# Altium PCB 2.0 IC patch.PcbDoc
Units mm, origin at the board's own origin, x right, y up, seen from the top; angles counter-clockwise.
Board outline 8.59 x 10.83 mm, 2 copper layers (Top Layer, Bottom Layer); 1 components, 0 nets, 56 pads, 0 vias.
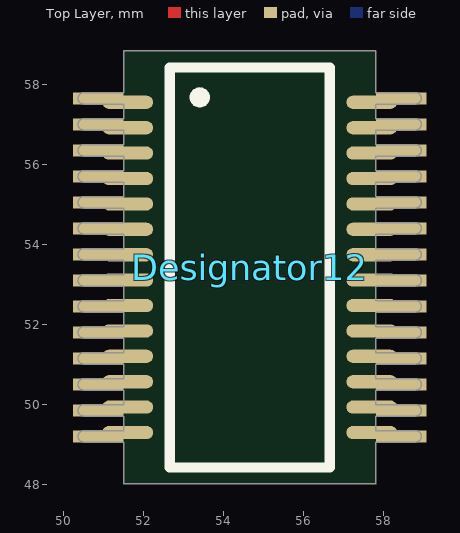
[diagram p0: Top Layer view]
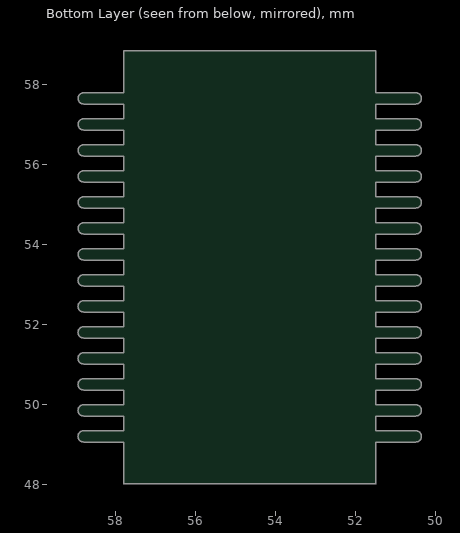
[diagram p1: Bottom Layer view, seen from below]

## Layer stack, top to bottom
Top Solder: solder mask 0.0102, Solder Resist, Dk 3.5
Top Layer: signal copper 0.0356
Dielectric 1: dielectric 0.32, FR-4, Dk 4.8
Bottom Layer: signal copper 0.0356
Bottom Solder: solder mask 0.0102, Solder Resist, Dk 3.5

## Board outline
50.495,49.061 cw(c50.495,49.201) 50.495,49.341 51.496,49.341 51.496,49.711 50.495,49.711 cw(c50.495,49.851) 50.495,49.991 51.496,49.991 51.496,50.361 50.495,50.361 cw(c50.495,50.501) 50.495,50.641 51.496,50.641 51.496,51.011 50.495,51.011 cw(c50.495,51.151) 50.495,51.291 51.496,51.291 51.496,51.661 50.495,51.661 cw(c50.495,51.801) 50.495,51.941 51.496,51.941 51.496,52.311 50.495,52.311 cw(c50.495,52.451) 50.495,52.591 51.496,52.591 51.496,52.961 50.495,52.961 cw(c50.495,53.101) 50.495,53.241 51.496,53.241 51.496,53.611 50.495,53.611 cw(c50.495,53.751) 50.495,53.891 51.496,53.891 51.496,54.261 50.495,54.261 cw(c50.495,54.401) 50.495,54.541 51.496,54.541 51.496,54.911 50.495,54.911 cw(c50.495,55.051) 50.495,55.191 51.496,55.191 51.496,55.561 50.495,55.561 cw(c50.495,55.701) 50.495,55.841 51.496,55.841 51.496,56.211 50.495,56.211 cw(c50.495,56.351) 50.495,56.491 51.496,56.491 51.496,56.861 50.495,56.861 cw(c50.495,57.001) 50.495,57.141 51.496,57.141 51.496,57.511 50.495,57.511 cw(c50.495,57.651) 50.495,57.791 51.496,57.791 51.496,58.828 cw(c51.509,58.828) 51.509,58.841 57.785,58.841 cw(c57.785,58.828) 57.787,58.84 cw(c57.787,58.827) 57.8,58.827 57.8,57.791 58.799,57.791 cw(c58.799,57.651) 58.939,57.651 cw(c58.799,57.651) 58.799,57.511 57.8,57.511 57.8,57.141 58.799,57.141 cw(c58.799,57.001) 58.939,57.001 cw(c58.799,57.001) 58.799,56.861 57.8,56.861 57.8,56.491 58.799,56.491 cw(c58.799,56.351) 58.939,56.351 cw(c58.799,56.351) 58.799,56.211 57.8,56.211 57.8,55.841 58.799,55.841 cw(c58.799,55.701) 58.939,55.701 cw(c58.799,55.701) 58.799,55.561 57.8,55.561 57.8,55.191 58.799,55.191 cw(c58.799,55.051) 58.939,55.051 cw(c58.799,55.051) 58.799,54.911 57.8,54.911 57.8,54.541 58.799,54.541 cw(c58.799,54.401) 58.939,54.401 cw(c58.799,54.401) 58.799,54.261 57.8,54.261 57.8,53.891 58.799,53.891 cw(c58.799,53.751) 58.939,53.751 cw(c58.799,53.751) 58.799,53.611 57.8,53.611 57.8,53.241 58.801,53.241 cw(c58.801,53.101) 58.941,53.101 cw(c58.801,53.101) 58.801,52.961 57.8,52.961 57.8,52.591 58.801,52.591 cw(c58.801,52.451) 58.941,52.451 cw(c58.801,52.451) 58.801,52.311 57.8,52.311 57.8,51.941 58.801,51.941 cw(c58.801,51.801) 58.941,51.801 cw(c58.801,51.801) 58.801,51.661 57.8,51.661 57.8,51.291 58.801,51.291 cw(c58.801,51.151) 58.941,51.151 cw(c58.801,51.151) 58.801,51.011 57.8,51.011 57.8,50.641 58.801,50.641 cw(c58.801,50.501) 58.941,50.501 cw(c58.801,50.501) 58.801,50.361 57.8,50.361 57.8,49.991 58.801,49.991 cw(c58.801,49.851) 58.941,49.851 cw(c58.801,49.851) 58.801,49.711 57.8,49.711 57.8,49.341 58.801,49.341 cw(c58.801,49.201) 58.941,49.201 cw(c58.801,49.201) 58.801,49.061 57.8,49.061 57.8,48.024 cw(c57.787,48.024) 57.787,48.011 51.511,48.011 cw(c51.511,48.024) 51.509,48.011 cw(c51.509,48.024) 51.496,48.024 51.496,49.061

## Design rules (kind name [scope] priority, off if disabled: settings)
Clearance [All] p1: gap=0.254 ignorepadtopadclearanceinfootprint=FALSE except(0: Arc-Hole Track-Hole SMDPad-Hole THPad-Hole Via-Hole Fill-Hole Poly-Hole Region-Hole Text-Hole)
PolygonConnect [All] p1: connectstyle=Relief reliefconductorwidth=0.254 reliefentries=4 polygonreliefangle="90 Angle" airgapwidth=0.254
RoutingVias [All] p1: holewidth=0.711 width=1.27 viastyle="Through Hole" minholewidth=0.711 minwidth=1.27 maxholewidth=0.711 maxwidth=1.27
SolderMaskExpansion [All] p1: expansion=0.102
Width [All] p1: maxlimit=0.254 minlimit=0.254 preferedwidth=0.254
30 further rules are at their usual default settings.

## Components (designator, comment, footprint, x,y, rotation, side; value= is the part's Value field where it differs from the comment)
Designator12 "Comment" SSOP-28 54.649,53.426 r0 top

## Footprints (in the part's own frame and the unit in brackets; to place one, negate y for a bottom-side part, rotate by r counter-clockwise, add the part's x,y. Pads: shape width x height; smd on the part's side, far side on the other; paste and mask are expansions set on the pad)
SSOP-28 [mm]
  oval 1.27x0.33 smd: 1(-3.05,4.127) 2(-3.05,3.492) 3(-3.05,2.857) 4(-3.05,2.222) 5(-3.05,1.587) 6(-3.05,0.953) 7(-3.05,0.318) 8(-3.05,-0.318) 9(-3.05,-0.953) 10(-3.05,-1.587) 11(-3.05,-2.222) 12(-3.05,-2.857) 13(-3.05,-3.492) 14(-3.05,-4.127) 15(3.05,-4.127) 16(3.05,-3.492) 17(3.05,-2.857) 18(3.05,-2.222) 19(3.05,-1.587) 20(3.05,-0.953) 21(3.05,-0.318) 22(3.05,0.318) 23(3.05,0.953) 24(3.05,1.587) 25(3.05,2.222) 26(3.05,2.857) 27(3.05,3.492) 28(3.05,4.127)
  silkscreen extent -2,-5 2,5, body extent -2,-5 2,5, height 1.75

## Free pads (board coordinates)
  rect 1.27x0.305 smd mask+0: 1(50.861,57.651) 2(50.861,57.001) 3(50.861,56.351) 4(50.861,55.701) 5(50.861,55.051) 6(50.861,54.401) 7(50.861,53.751) 8(50.861,53.101) 9(50.861,52.451) 10(50.861,51.801) 11(50.861,51.151) 12(50.861,50.501) 13(50.861,49.851) 14(50.861,49.201) 15(58.435,49.201) 16(58.435,49.851) 17(58.435,50.501) 18(58.435,51.151) 19(58.435,51.801) 20(58.435,52.451) 21(58.435,53.101) 22(58.435,53.751) 23(58.435,54.401) 24(58.435,55.051) 25(58.435,55.701) 26(58.435,56.351) 27(58.435,57.001) 28(58.435,57.651)

## Nets (pads, with @x,y where several pads share a name; then routed paths per layer and width w, separated by ;. In a path a pad name is that pad's centre, name@x,y a point inside that pad or via, vN(x,y) a via of type N, cw(c..) or ccw(c..) an arc to the next point about the centre after c; other vN are vias at no path point)
pads on no net: Designator12.1 Designator12.2 Designator12.3 Designator12.4 Designator12.5 Designator12.6 Designator12.7 Designator12.8 Designator12.9 Designator12.10 Designator12.11 Designator12.12 Designator12.13 Designator12.14 Designator12.15 Designator12.16 Designator12.17 Designator12.18 Designator12.19 Designator12.20 Designator12.21 Designator12.22 Designator12.23 Designator12.24 Designator12.25 Designator12.26 Designator12.27 Designator12.28

## Silkscreen, mask and mechanical layers (free items; w line width, h text height)
Mechanical 1:
  lines w0.025: 51.511,49.074 50.495,49.074 cw(c50.495,49.201) 50.495,49.328 51.511,49.328 ; 51.511,49.724 50.495,49.724 cw(c50.495,49.851) 50.495,49.978 51.511,49.978 ; 51.511,50.374 50.495,50.374 cw(c50.495,50.501) 50.495,50.628 51.511,50.628 ; 51.511,51.024 50.495,51.024 cw(c50.495,51.151) 50.495,51.278 51.511,51.278 ; 51.511,51.674 50.495,51.674 cw(c50.495,51.801) 50.495,51.928 51.511,51.928 ; 51.511,52.324 50.495,52.324 cw(c50.495,52.451) 50.495,52.578 51.511,52.578 ; 51.511,52.974 50.495,52.974 cw(c50.495,53.101) 50.495,53.228 51.511,53.228 ; 51.511,53.624 50.495,53.624 cw(c50.495,53.751) 50.495,53.878 51.511,53.878 ; 51.511,54.274 50.495,54.274 cw(c50.495,54.401) 50.495,54.528 51.511,54.528 ; 51.511,54.924 50.495,54.924 cw(c50.495,55.051) 50.495,55.178 51.511,55.178 ; 51.511,55.574 50.495,55.574 cw(c50.495,55.701) 50.495,55.828 51.511,55.828 ; 51.511,56.224 50.495,56.224 cw(c50.495,56.351) 50.495,56.478 51.511,56.478 ; 51.511,56.874 50.495,56.874 cw(c50.495,57.001) 50.495,57.128 51.511,57.128 ; 51.511,57.524 50.495,57.524 cw(c50.495,57.651) 50.495,57.778 51.511,57.778 ; 57.783,53.624 58.799,53.624 ccw(c58.799,53.751) 58.799,53.878 57.783,53.878 ; 57.783,54.274 58.799,54.274 ccw(c58.799,54.401) 58.799,54.528 57.783,54.528 ; 57.783,54.924 58.799,54.924 ccw(c58.799,55.051) 58.799,55.178 57.783,55.178 ; 57.783,55.574 58.799,55.574 ccw(c58.799,55.701) 58.799,55.828 57.783,55.828 ; 57.783,56.224 58.799,56.224 ccw(c58.799,56.351) 58.799,56.478 57.783,56.478 ; 57.783,56.874 58.799,56.874 ccw(c58.799,57.001) 58.799,57.128 57.783,57.128 ; 57.783,57.524 58.799,57.524 ccw(c58.799,57.651) 58.799,57.778 57.783,57.778 ; 57.785,48.024 51.509,48.024 51.509,58.828 57.785,58.828 ; 57.785,49.074 58.801,49.074 ccw(c58.801,49.201) 58.801,49.328 57.785,49.328 ; 57.785,49.724 58.801,49.724 ccw(c58.801,49.851) 58.801,49.978 57.785,49.978 ; 57.785,50.374 58.801,50.374 ccw(c58.801,50.501) 58.801,50.628 57.785,50.628 ; 57.785,51.024 58.801,51.024 ccw(c58.801,51.151) 58.801,51.278 57.785,51.278 ; 57.785,51.674 58.801,51.674 ccw(c58.801,51.801) 58.801,51.928 57.785,51.928 ; 57.785,52.324 58.801,52.324 ccw(c58.801,52.451) 58.801,52.578 57.785,52.578 ; 57.785,52.974 58.801,52.974 ccw(c58.801,53.101) 58.801,53.228 57.785,53.228 ; 57.787,48.024 57.787,58.827